# Altium PCB Main.PcbDoc
Units mm, origin at the board's own origin, x right, y up, seen from the top; angles counter-clockwise.
Board outline 12 x 21 mm, 2 copper layers (Top Layer, Bottom Layer); 7 components, 5 nets, 19 pads, 1 vias.
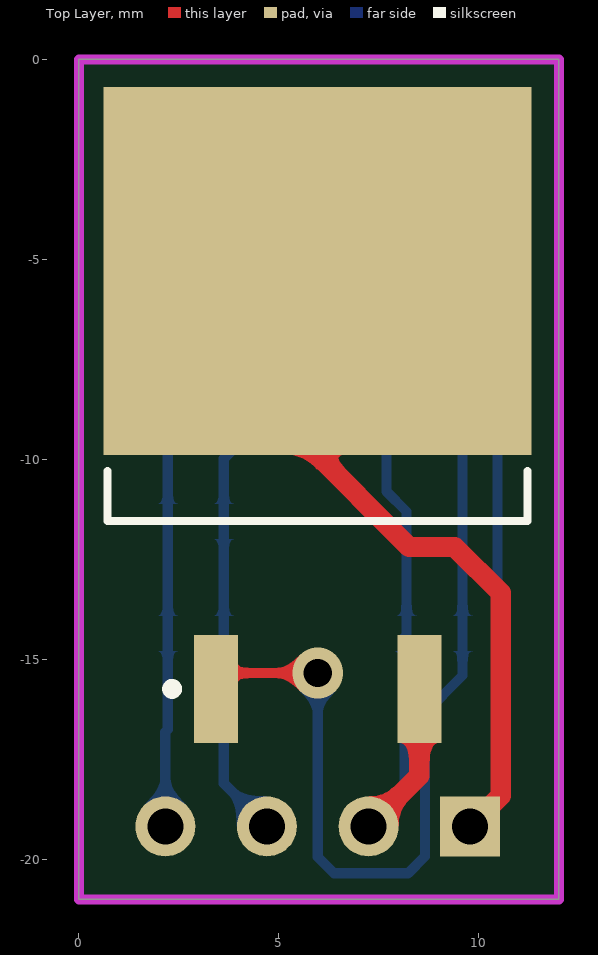
[diagram p0: Top Layer view]
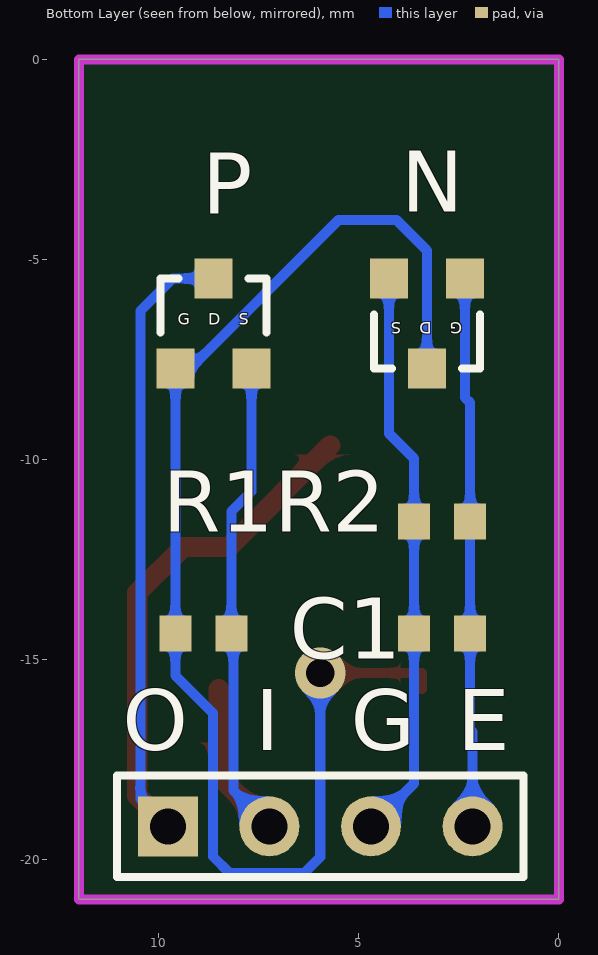
[diagram p1: Bottom Layer view, seen from below]

## Layer stack, top to bottom
Top Solder: solder mask 0.0102, Solder Resist, Dk 3.5
Top Layer: signal copper 0.0356
Dielectric 1: dielectric 0.32, FR-4, Dk 4.8
Bottom Layer: signal copper 0.0356
Bottom Solder: solder mask 0.0102, Solder Resist, Dk 3.5

## Board outline
0,-21 0,0 12,0 12,-21

## Design rules (kind name [scope] priority, off if disabled: settings)
Clearance [All] p1: gap=0.254 ignorepadtopadclearanceinfootprint=FALSE except(0: Arc-Hole Track-Hole SMDPad-Hole THPad-Hole Via-Hole Fill-Hole Poly-Hole Region-Hole Text-Hole)
PolygonConnect [All] p1: connectstyle=Relief reliefconductorwidth=0.254 reliefentries=4 polygonreliefangle="90 Angle" airgapwidth=0.254
RoutingVias [All] p1: holewidth=0.711 width=1.27 viastyle="Through Hole" minholewidth=0.711 minwidth=1.27 maxholewidth=0.711 maxwidth=1.27
SolderMaskExpansion [All] p1: expansion=0.102 istentingtop=FALSE
Width [All] p1: maxlimit=0.254 minlimit=0.254 preferedwidth=0.254
30 further rules are at their usual default settings.

## Components (designator, comment, footprint, x,y, rotation, side; value= is the part's Value field where it differs from the comment)
C1 "Cap" 0603 2.921,-14.351 r180 bottom value=100pF
N "MOSFET-N" SOT23-3-PMOS 3.302,-6.604 r0 bottom (schematic designator Q2)
P "MOSFET-P" SOT23-3-PMOS 8.636,-6.604 r180 bottom (schematic designator Q1)
P1 "Header 4" HDR1X4 9.779,-19.177 r180 bottom
Q3 "MOSFET-P" D2PAK 5.969,-8.89 r90 top
R1 "Res1" 0603 8.89,-14.351 r0 bottom value=4.7K
R2 "Res1" 0603 2.921,-11.557 r180 bottom value=4.7K

## Footprints (in the part's own frame and the unit in brackets; to place one, negate y for a bottom-side part, rotate by r counter-clockwise, add the part's x,y. Pads: shape width x height; smd on the part's side, far side on the other; paste and mask are expansions set on the pad)
0603 [mm] "Chip Capacitor, Body 1.6x0.8mm, IPC High Density"
  rect 0.8x0.9 smd: 1(-0.7,0) 2(0.7,0)
  body extent -0.87,-0.48 0.87,0.48, height 1.3
D2PAK [mm] "D2-PAK, 4-Leads, Body 8.8x10.4mm, Pitch 2.54mm, Lead Span 15.1mm, IPC Low Density"
  rect 9.2x10.7 smd: 1(3.6,0)
  rect 2.7x1.1 smd: 2(-6.85,2.54) 3(-6.85,-2.54)
  silkscreen extent -6.97,-5.25 -1.4,5.25, body extent -2.65,-5.28 6.35,5.28, height 4.69
HDR1X4 [mm] "Connector; Header; 4 Position"
  rect 1.5x1.5 hole 0.9: 1(0,0)
  round 1.5 hole 0.9: 2(2.54,0) 3(5.08,0) 4(7.62,0)
  silkscreen extent -1.27,-1.27 8.89,1.27
SOT23-3-PMOS [mm] "SOT-23; 3 Leads; Body 3.0 x 2.5 mm, inc. leads (LxW max)"
  rect 0.95x1 smd: 1(0,1.125) 2(-0.95,-1.125) 3(0.95,-1.125)
  silkscreen extent -1.33,-0.22 1.33,1.13

## Part data
C1: "Capacitor", LatestRevisionDate=17-Jul-2002, LatestRevisionNote="Re-released for DXP Platform.", PackageDescription="Radial Cap, Thru-Hole; 2 Leads; 0.3 in Pin Spacing", PackageReference=RAD-0.3, Published=8-Jun-2000, Publisher="Altium Limited"
N: "N-Channel MOSFET", LatestRevisionDate=17-Jul-2002, LatestRevisionNote="Re-released for DXP Platform.", PackageDescription="TO, Flat Index; 3 In-Line, Axial Leads; Body Dia. 4.6mm; Lead Dia. 0.5 mm (max)", PackageReference=E3, PackageVersion=1995/1996, Published=8-Jun-2000, Publisher="Altium Limited"
P Q3: "P-Channel MOSFET", LatestRevisionDate=17-Jul-2002, LatestRevisionNote="Re-released for DXP Platform.", PackageDescription="TO, Flat Index; 3 In-Line, Axial Leads; Body Dia. 4.6mm; Lead Dia. 0.5 mm (max)", PackageReference=E3, PackageVersion=1995/1996, Published=8-Jun-2000, Publisher="Altium Limited"
P1: "Header, 4-Pin", LatestRevisionDate=17-Jul-2002, LatestRevisionNote="Re-released for DXP Platform.", Publisher="Altium Limited"
R1 R2: "Resistor", LatestRevisionDate=17-Jul-2002, LatestRevisionNote="Re-released for DXP Platform.", PackageDescription="Axial Device, Thru-Hole; 2 Leads; 0.3 in Pin Spacing", PackageReference=AXIAL-0.3, Published=8-Jun-2000, Publisher="Altium Limited"

## Via types
v1: diameter 1.27, hole 0.711, Top Layer to Bottom Layer, 1 vias

## Nets (pads, with @x,y where several pads share a name; then routed paths per layer and width w, separated by ;. In a path a pad name is that pad's centre, name@x,y a point inside that pad or via, vN(x,y) a via of type N, cw(c..) or ccw(c..) an arc to the next point about the centre after c; other vN are vias at no path point)
NetC1_1: C1.1 N.3 P1.3 R2.1 | length 14.4
  Bottom Layer w0.254: N.3 4.252,-9.351 3.621,-9.982 R2.1 C1.1 3.621,-18.099 P1.3
NetC1_2: C1.2 N.2 P1.4 R2.2 | length 13.8
  Bottom Layer w0.254: P1.4 2.159,-16.815 2.221,-16.753 C1.2 R2.2 2.221,-8.585 2.352,-8.454 N.2
NetP1_1: P1.1 P.1 Q3.1 | length 27.8
  Top Layer w0.508: Q3.1@5.715,-9.652 8.255,-12.192 9.398,-12.192 10.541,-13.335 10.541,-18.415 P1.1
  Bottom Layer w0.254: P.1 9.652,-5.479 10.465,-6.292 10.465,-18.491 P1.1
NetP1_2: P1.2 P.3 Q3.3 R1.1 | length 16
  Top Layer w0.508: P1.2 8.509,-17.907 Q3.3
  Bottom Layer w0.254: P1.2 8.14,-18.276 8.14,-14.443 8.19,-14.443 R1.1 8.19,-11.303 7.686,-10.799 P.3
NetQ1_2: N.1 P.2 Q3.2 R1.2 | length 34.2
  Top Layer w0.254: Q3.2 3.429,-15.342 v1(5.969,-15.342)
  Bottom Layer w0.254: N.1 3.302,-4.775 4.064,-4.013 5.504,-4.013 9.22,-7.729 P.2 9.586,-11.045 9.59,-11.049 R1.2 9.59,-15.404 8.648,-16.346 8.648,-19.927 8.23,-20.345 6.375,-20.345 5.969,-19.939 v1(5.969,-15.342)

## Keep-outs
Keep-Out Layer:
  the board outline again, w0.254

## Silkscreen, mask and mechanical layers (free items; w line width, h text height)
Bottom Overlay:
  text "E" at 2.54,-17.272 h1.52
  text "G" at 5.207,-17.272 h1.52
  text "I" at 6.985,-17.272 h1.52
  text "O" at 9.271,-17.272 h1.52
Top Paste:
  lines w0.254: 8.509,-16.764 8.636,-16.637
Top Solder:
  lines w0.508: 5.842,-9.779 8.255,-12.192 9.398,-12.192 10.541,-13.335 10.541,-18.415 9.779,-19.177 ; 7.239,-19.177 8.509,-17.907 8.509,-16.764

## Text inside footprints (layer, text, board x,y; h text height)
N: Bottom Overlay "G" at 2.413,-6.477 h0.5 r180; Bottom Overlay "S" at 3.937,-6.477 h0.5 r180; Bottom Overlay "D" at 3.175,-6.477 h0.5 r180
P: Bottom Overlay "G" at 9.525,-6.731 h0.5; Bottom Overlay "S" at 8.001,-6.731 h0.5; Bottom Overlay "D" at 8.763,-6.731 h0.5